# Altium PCB brd.PcbDoc
Units mm, origin at the board's own origin, x right, y up, seen from the top; angles counter-clockwise.
Board outline 57 x 46 mm, 2 copper layers (Top Layer, Bottom Layer); 6 components, 19 nets, 52 pads, 0 vias.
Unrouted connection lines stored in the file: 2.
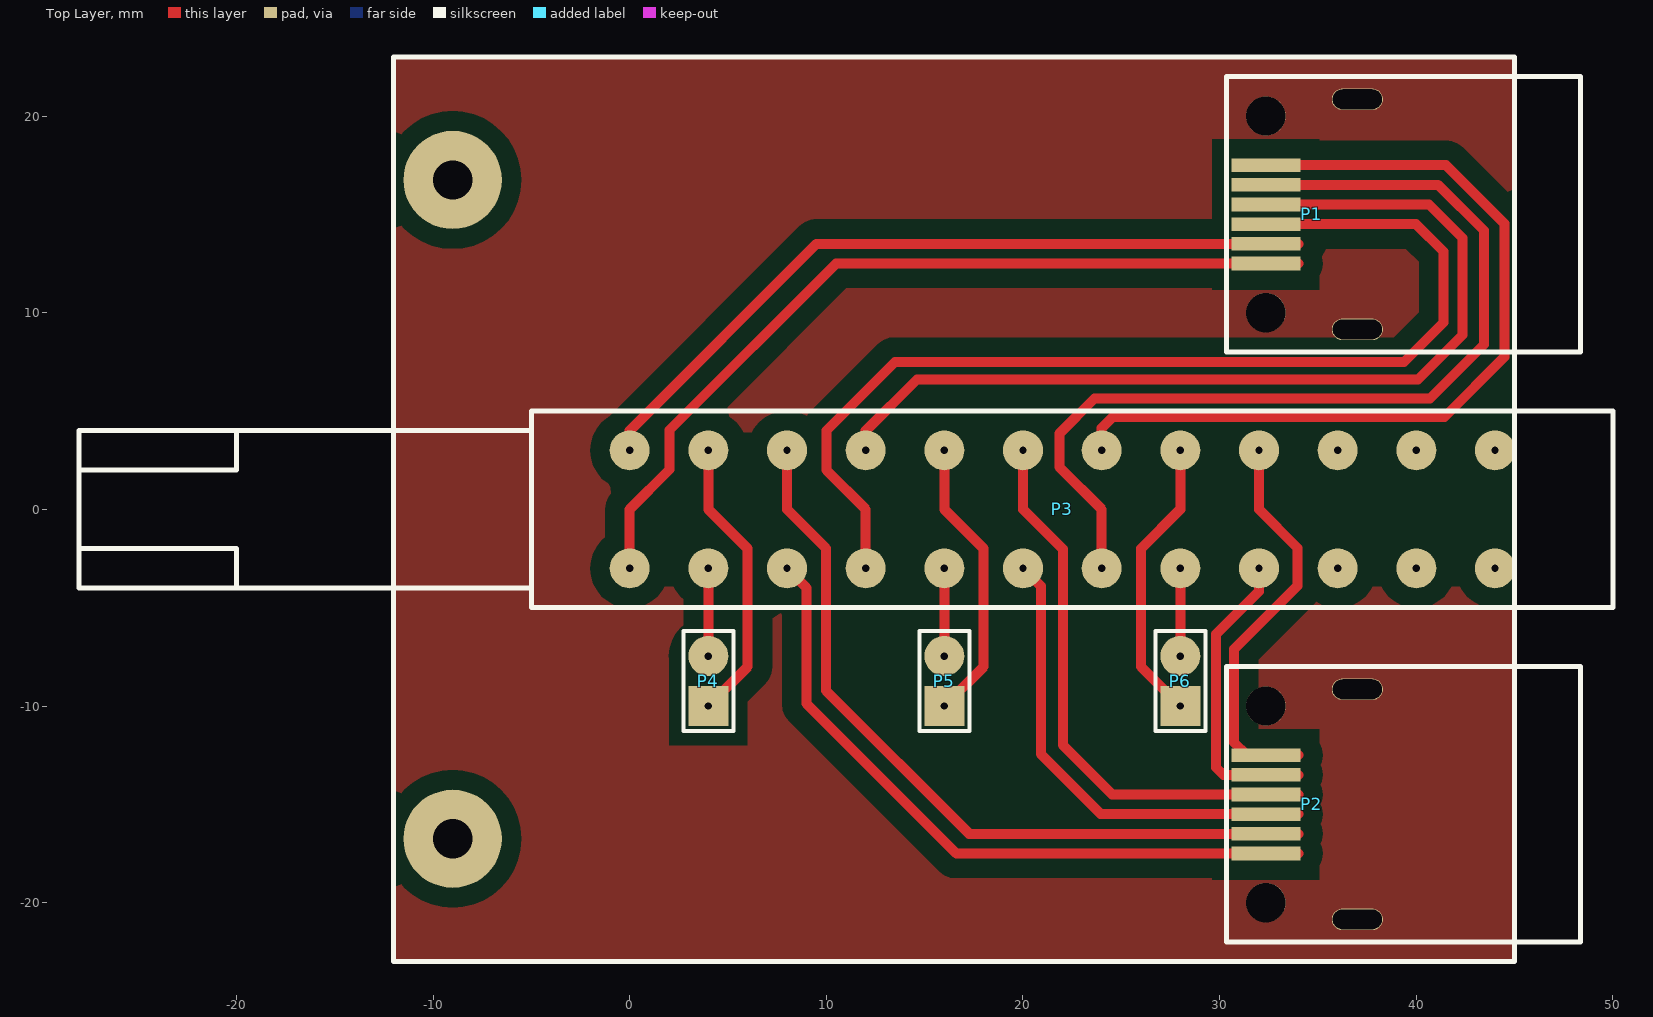
[diagram p0: Top Layer view]
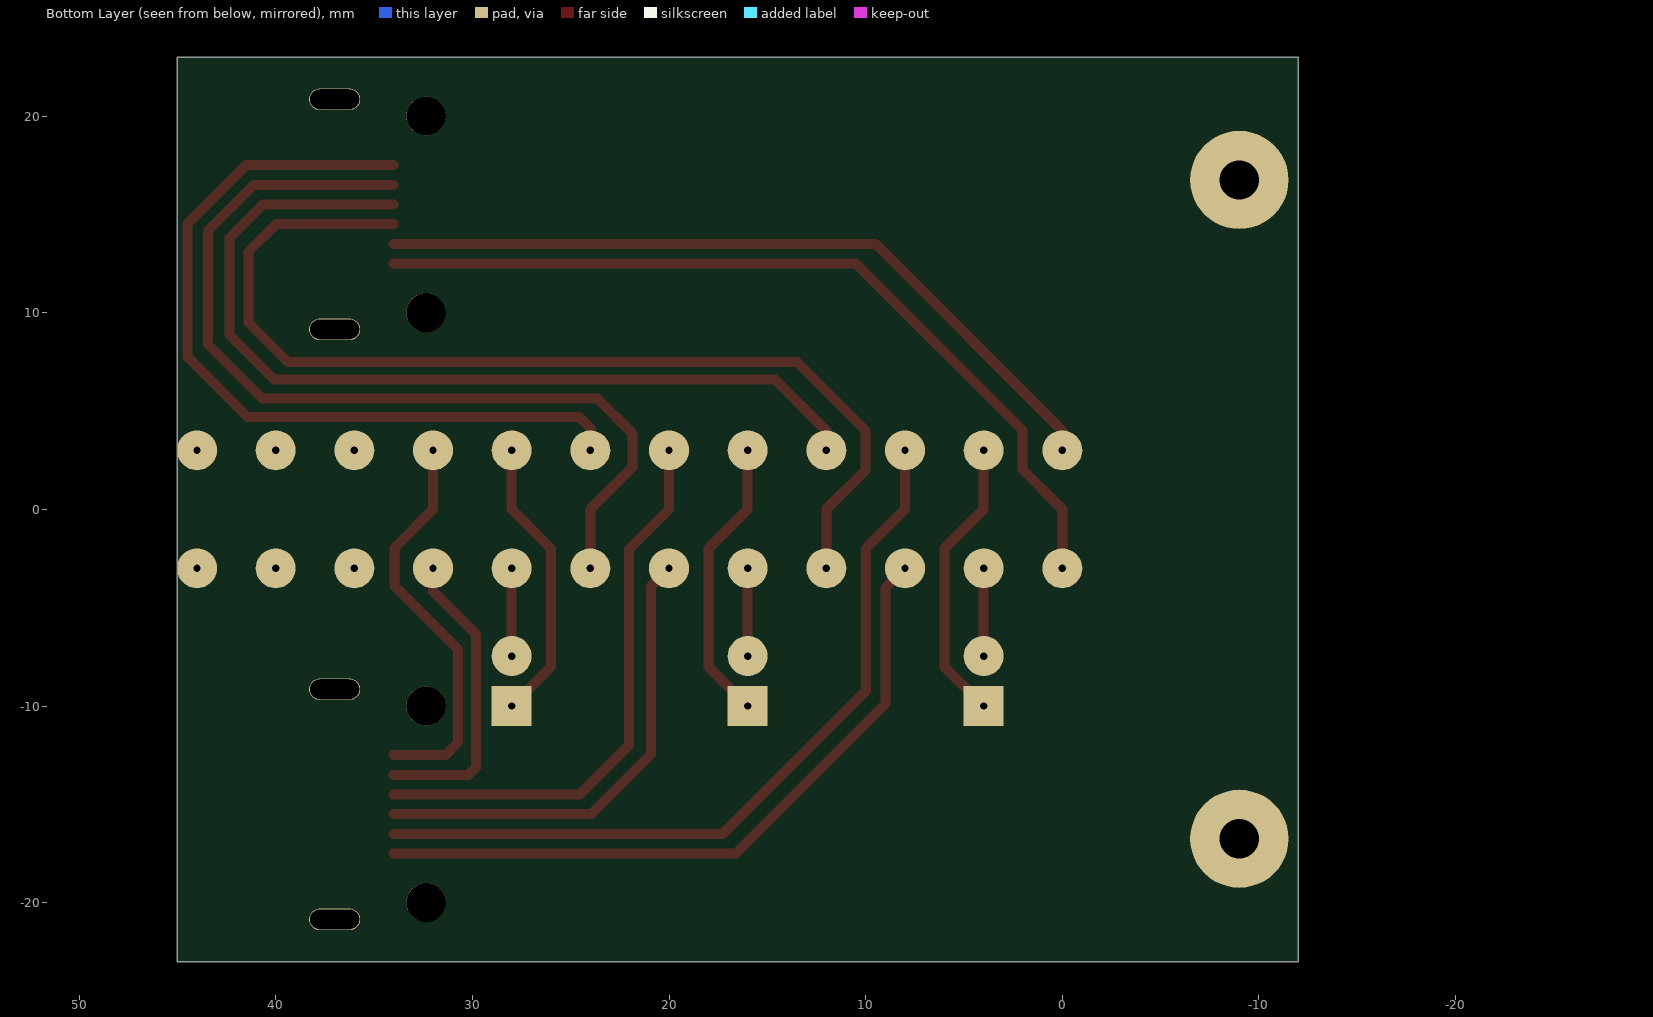
[diagram p1: Bottom Layer view, seen from below]

## Layer stack, top to bottom
Top Solder: solder mask 0.0102, Solder Resist, Dk 3.5
Top Layer: signal copper 0.0356
Dielectric 1: dielectric 0.32, FR-4, Dk 4.8
Bottom Layer: signal copper 0.0356
Bottom Solder: solder mask 0.0102, Solder Resist, Dk 3.5

## Board outline
-12,-23 45,-23 45,23 -12,23

## Design rules (kind name [scope] priority, off if disabled: settings)
Clearance [All] p1: gap=0.254 ignorepadtopadclearanceinfootprint=FALSE except(0: Arc-Hole Track-Hole SMDPad-Hole THPad-Hole Via-Hole Fill-Hole Poly-Hole Region-Hole Text-Hole; 1: Arc-Fill Arc-Poly Arc-Region Track-Fill Track-Poly Track-Region SMDPad-Fill SMDPad-Poly SMDPad-Region THPad-Fill THPad-Poly THPad-Region Via-Fill Via-Poly Via-Region Fill-Fill Fill-Poly Fill-Region Poly-Poly Poly-Region Region-Region)
PolygonConnect [All] p1: connectstyle=Direct reliefconductorwidth=0.254 reliefentries=4 polygonreliefangle="90 Angle" airgapwidth=0.254
RoutingVias [All] p1: holewidth=0.711 width=1.27 viastyle="Through Hole" minholewidth=0.711 minwidth=1.27 maxholewidth=0.711 maxwidth=1.27
SolderMaskExpansion [All] p1: expansion=0.102
Width [All] p1: maxlimit=25.4 minlimit=0.127 preferedwidth=0.254
30 further rules are at their usual default settings.

## Components (designator, comment, footprint, x,y, rotation, side; value= is the part's Value field where it differs from the comment)
P1 "Header 8" DS1102 32.35,15 r90 top
P2 "Header 8" DS1102 32.35,-15 r90 top
P3 "Header 12X2" P2K-8 0,0 r0 top
P4 "Header 2" HDR1X2 4,-10 r90 top
P5 "Header 2" HDR1X2 16,-10 r90 top
P6 "Header 2" HDR1X2 28,-10 r90 top

## Footprints (in the part's own frame and the unit in brackets; to place one, negate y for a bottom-side part, rotate by r counter-clockwise, add the part's x,y. Pads: shape width x height; smd on the part's side, far side on the other; paste and mask are expansions set on the pad)
DS1102 [mm]
  rect 0.7x3.5 smd: 1(-2.5,0) 2(-1.5,0) 3(-0.5,0) 4(0.5,0) 5(1.5,0) 6(2.5,0)
  round 2 hole 2: 7(-5,0) 7(5,0)
  oval 1.1x2.6 hole 1 slot 2.5 at 90 deg: 8(-5.85,-4.65) 8(5.85,-4.65)
  silkscreen extent -7,-16 7,2
HDR1X2 [mil] "Connector; Header; 2 Position"
  rect 80x80 hole 15: 1(0,0)
  round 80 hole 15: 2(100,0)
  silkscreen extent -50,-50 150,50
P2K-8 [mil]
  round 80 hole 15: 1(0,118.11) 1(1732.28,-118.11) 2(0,-118.11) 3(157.48,118.11) 4(157.48,-118.11) 5(314.96,118.11) 6(314.96,-118.11) 7(472.44,118.11) 8(472.44,-118.11) 9(629.92,118.11) 10(629.92,-118.11) 11(787.4,118.11) 12(787.4,-118.11) 13(944.88,118.11) 14(944.88,-118.11) 15(1102.36,118.11) 16(1102.36,-118.11) 17(1259.84,118.11) 18(1259.84,-118.11) 19(1417.32,118.11) 20(1417.32,-118.11) 21(1574.8,118.11) 22(1574.8,-118.11) 23(1732.28,118.11)
  silkscreen extent -1102,-197 1969,197

## Part data
P1 P2: "Header, 8-Pin", LatestRevisionDate=17-Jul-2002, LatestRevisionNote="Re-released for DXP Platform.", Publisher="Altium Limited"
P3: "Header, 12-Pin, Dual row", LatestRevisionDate=17-Jul-2002, LatestRevisionNote="Re-released for DXP Platform.", Publisher="Altium Limited"
P4 P5 P6: "Header, 2-Pin", LatestRevisionDate=17-Jul-2002, LatestRevisionNote="Re-released for DXP Platform.", Publisher="Altium Limited"

## Free pads (board coordinates)
  round 5 hole 2: 4(-9,-16.75) 4(-9,16.75)

## Nets (pads, with @x,y where several pads share a name; then routed paths per layer and width w, separated by ;. In a path a pad name is that pad's centre, name@x,y a point inside that pad or via, vN(x,y) a via of type N, cw(c..) or ccw(c..) an arc to the next point about the centre after c; other vN are vias at no path point)
GND: P1.7 P1.8 P2.7 P2.8
NetP3_3: P3.3 P4.1 | length 14.7
  Top Layer w0.508: P4.1 6,-8 6,-2 4,0 P3.3
NetP3_4: P3.4 P4.2 | length 4.5
  Top Layer w0.508: P4.2 P3.4
NetP3_9: P3.9 P5.1 | length 14.7
  Top Layer w0.508: P5.1 18,-8 18,-2 16,0 P3.9
NetP3_10: P3.10 P5.2 | length 4.5
  Top Layer w0.508: P5.2 P3.10
NetP3_15: P3.15 P6.1 | length 14.7
  Top Layer w0.508: P6.1 26,-8 26,-2 28,0 P3.15
NetP3_16: P3.16 P6.2 | length 4.5
  Top Layer w0.508: P6.2 P3.16
S0_0: P1.1 P3.2 | length 43.3
  Top Layer w0.508: P3.2 0,0 2.032,2.032 2.032,4.032 10.5,12.5 P1.1 P1.1@34,12.5
S0_1: P1.2 P3.1 | length 38.9
  Top Layer w0.508: P3.1@0,3 0,4 9.5,13.5 P1.2 P1.2@34,13.5
S0_2: P1.3 P3.8 | length 53
  Top Layer w0.508: P3.8 12,0 10.008,1.992 10.008,4.008 13.493,7.493 39.37,7.493 41.377,9.5 41.377,13.106 39.983,14.5 P1.3@34,14.5
S0_3: P1.4 P3.7 | length 47.3
  Top Layer w0.508: P3.7 12,4 14.604,6.604 40.081,6.604 42.342,8.865 42.342,13.792 40.64,15.494 34.006,15.494 P1.4@34,15.5
S0_4: P1.5 P3.14 | length 47.4
  Top Layer w0.508: P3.14 24,0 21.844,2.156 21.844,3.844 23.639,5.639 40.691,5.639 43.434,8.382 43.434,14.173 41.107,16.5 P1.5@34,16.5
S0_5: P1.6 P3.13 | length 41.6
  Top Layer w0.508: P3.13 24,4.137 24.562,4.699 41.427,4.699 44.475,7.747 44.475,14.529 41.504,17.5 P1.6@34,17.5
S1_0: P2.1 P3.6 | length 35.5
  Top Layer w0.508: P3.6 8.992,-3.992 8.992,-9.881 16.611,-17.5 P2.1 P2.1@34,-17.5
S1_1: P2.2 P3.5 | length 40.1
  Top Layer w0.508: P3.5 8,0 9.982,-1.982 9.982,-9.22 17.262,-16.5 P2.2 P2.2@34,-16.5
S1_2: P2.3 P3.12 | length 24.2
  Top Layer w0.508: P3.12 20.904,-3.904 20.904,-12.446 23.952,-15.494 33.994,-15.494 P2.3@34,-15.5
S1_3: P2.4 P3.11 | length 28.8
  Top Layer w0.508: P3.11 20,0 22.022,-2.022 22.022,-11.989 24.533,-14.5 P2.4 P2.4@34,-14.5
S1_4: P2.5 P3.18 | length 15.4
  Top Layer w0.508: P3.18 32,-4.17 29.82,-6.35 29.82,-13.132 30.188,-13.5 P2.5 P2.5@34,-13.5
S1_5: P2.6 P3.17 | length 20.5
  Top Layer w0.508: P3.17 32,0 33.96,-1.96 33.96,-3.886 30.734,-7.112 30.734,-11.862 31.372,-12.5 P2.6 P2.6@34,-12.5
pads on no net: P3.19 P3.20 P3.21 P3.22 P3.23

## Polygon pours and split planes (outlines as drawn)
GND on Top Layer "G" (solid, remove dead copper, pour order 0): -12,-23 45,-23 45,23 -12,23

## Silkscreen, mask and mechanical layers (free items; w line width, h text height)
Top Overlay:
  the board outline again, w0.254